# Altium PCB PCB1.PcbDoc
Units mil, origin at the board's own origin, x right, y up, seen from the top; angles counter-clockwise.
Board outline 3083 x 1476 mil, 2 copper layers (Top Layer, Bottom Layer); 15 components, 13 nets, 62 pads, 8 vias.
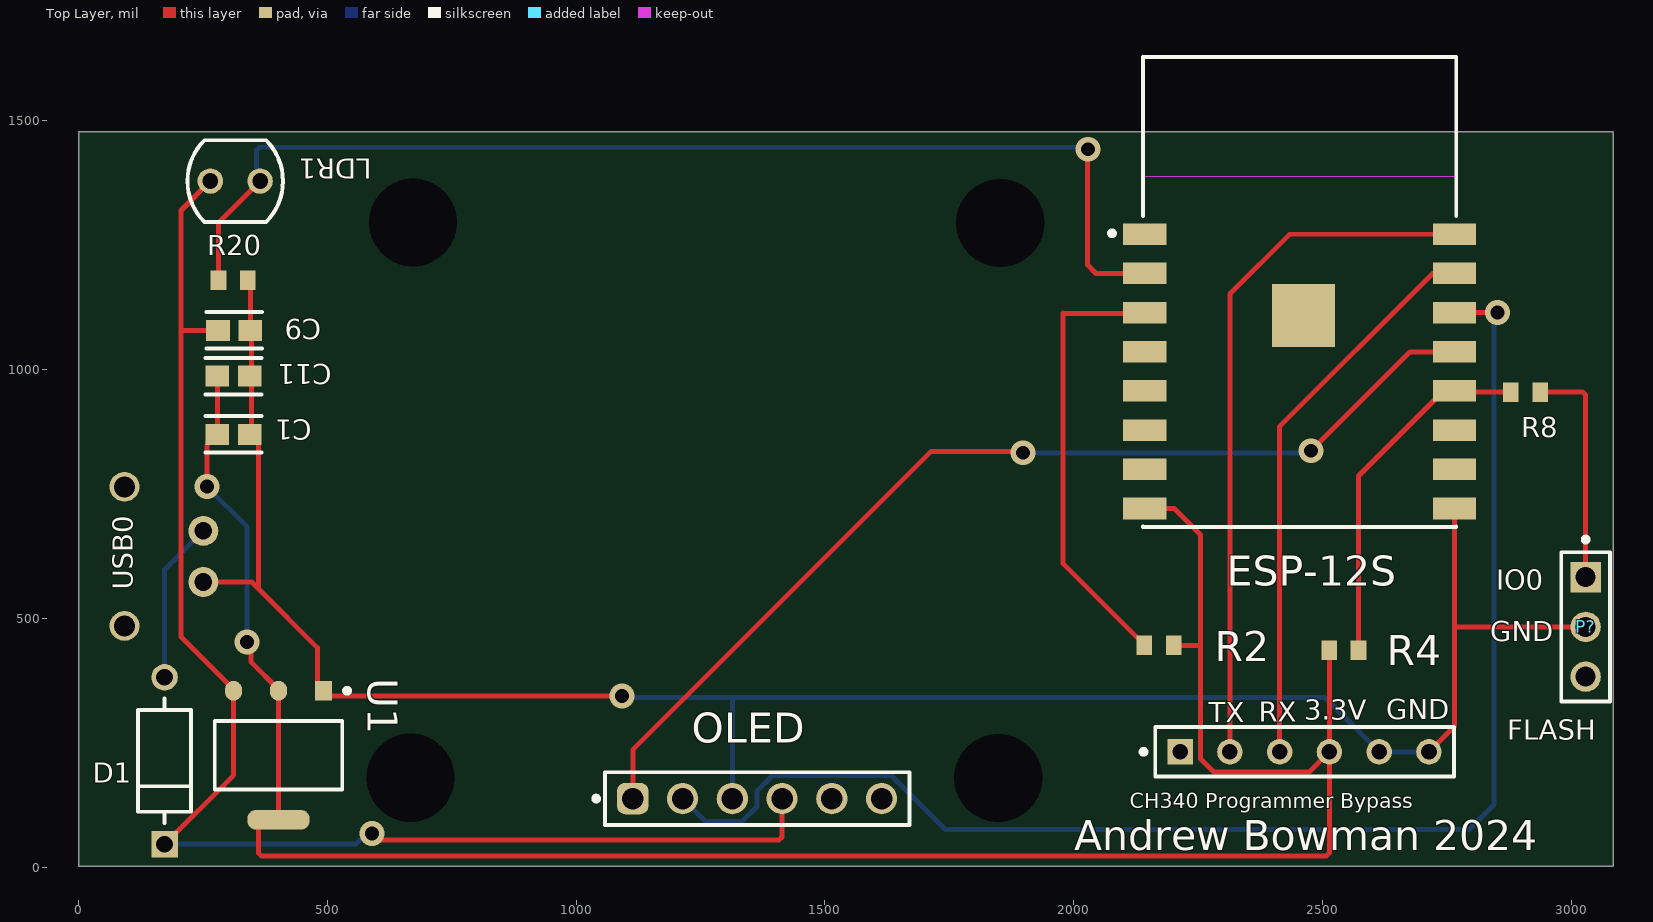
[diagram p0: Top Layer view]
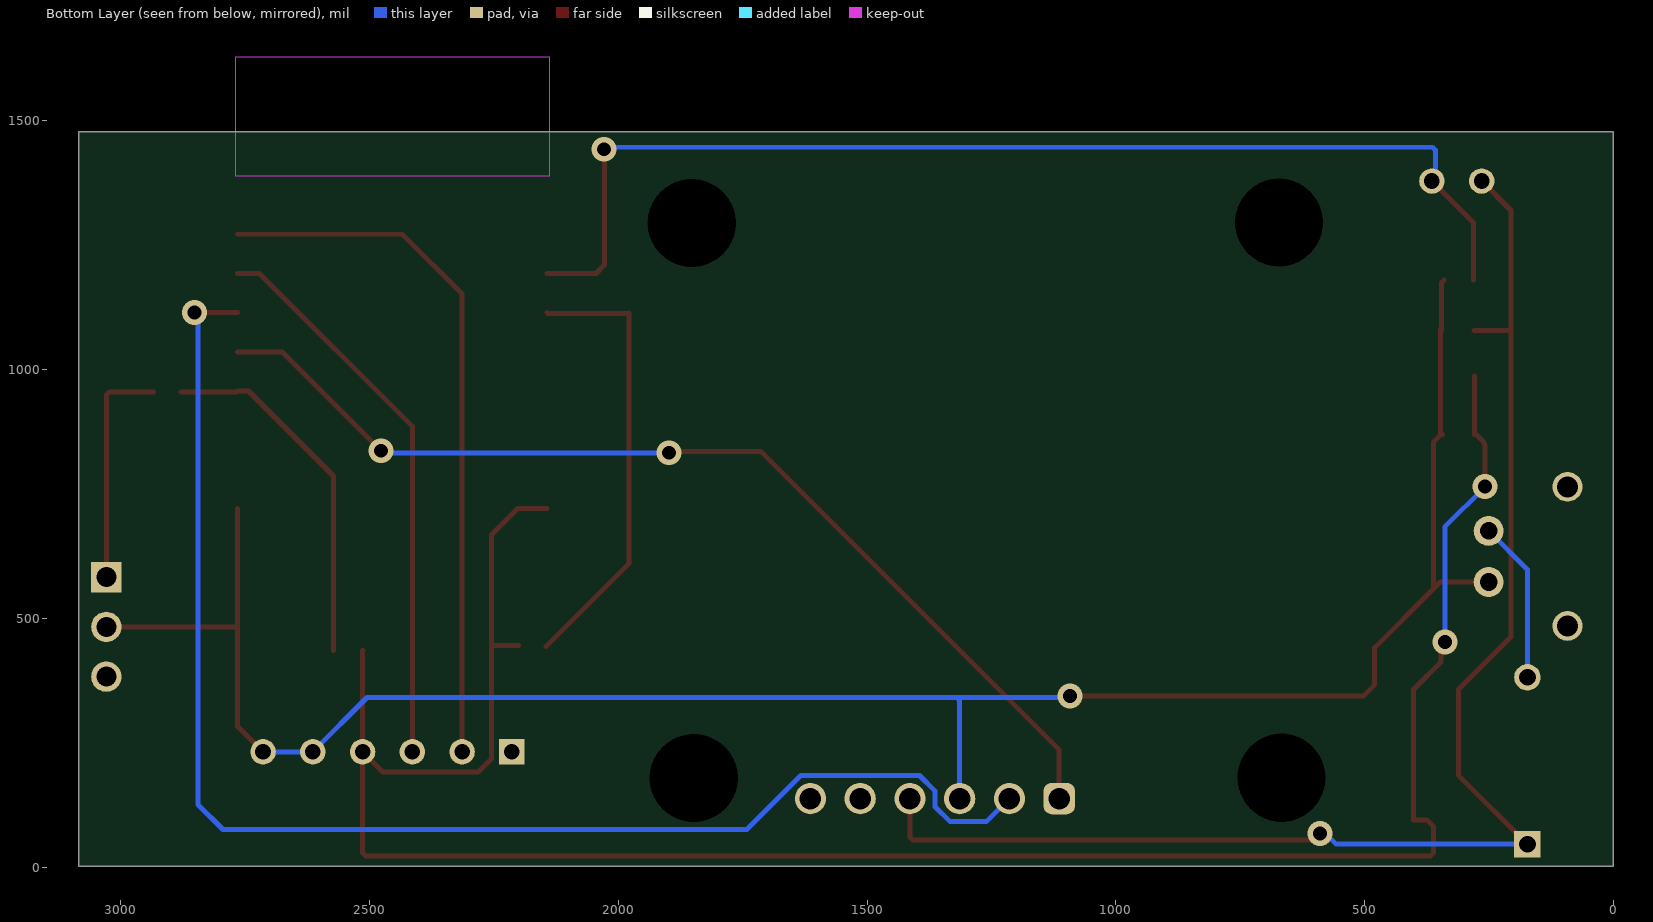
[diagram p1: Bottom Layer view, seen from below]
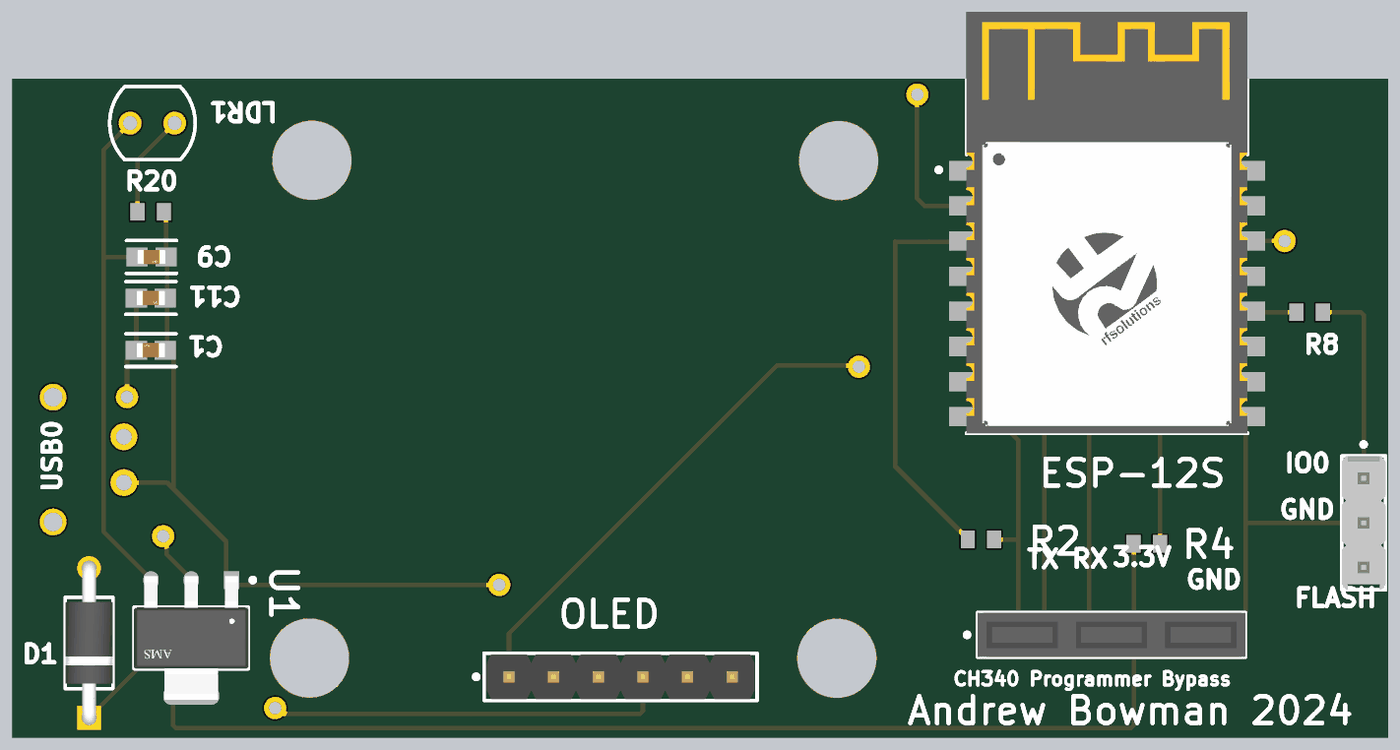
[diagram p2: 3D render of the assembled board from above, using the file's embedded part models]

## Layer stack, top to bottom
Top Solder: solder mask 0.4, Solder Resist, Dk 3.5
Top Layer: signal copper 1.4
Dielectric 1: dielectric 12.6, FR-4, Dk 4.8
Bottom Layer: signal copper 1.4
Bottom Solder: solder mask 0.4, Solder Resist, Dk 3.5

## Board outline
1,2 3084,2 3084,1478 1,1478

## Design rules (kind name [scope] priority, off if disabled: settings)
Clearance Clearance_1 [OnMid vs OnMid] p1: gap=10 ignorepadtopadclearanceinfootprint=FALSE except(20: Arc-Arc Arc-Track Arc-Text Track-Track Track-Text Text-Text) sourcerule=38 cellrowname=All cellrowtype=0 cellcolname=All cellcoltype=0 innerlayers=TRUE
Clearance Clearance_2 [(ExistsOnLayer('Top Layer') Or ExistsOnLayer('Bottom Layer')) vs (ExistsOnLayer('Top Layer') Or ExistsOnLayer('Bottom Layer'))] p2: gap=10 ignorepadtopadclearanceinfootprint=FALSE except(20: Arc-Arc Arc-Track Arc-Text Track-Track Track-Text Text-Text) sourcerule=38 cellrowname=All cellrowtype=0 cellcolname=All cellcoltype=0 outerlayers=TRUE
Clearance [All] p3: gap=10 ignorepadtopadclearanceinfootprint=FALSE ismatrix=TRUE
PolygonConnect [All] p1: connectstyle=Relief reliefconductorwidth=10 reliefentries=4 polygonreliefangle="90 Angle" airgapwidth=10
RoutingVias [All] p1: holewidth=28 width=50 viastyle="Through Hole" minholewidth=28 minwidth=50 maxholewidth=28 maxwidth=50
SolderMaskExpansion [All] p1: expansion=4 istentingtop=FALSE
SupplyNets "Schematic Supply Nets" [InNet('GND')] p1: voltage=0.000
Width MaxMinWidth_1 [All] p1: maxlimit=20 minlimit=10 preferedwidth=10 minimp=50.000000 maximp=50.000000 favimp=50.000000
Width [All] p2: maxlimit=10 minlimit=10 preferedwidth=10
30 further rules are at their usual default settings.

## Components (designator, comment, footprint, x,y, rotation, side; value= is the part's Value field where it differs from the comment)
C1 "06035C102KAT2A" FP-0603-L_1_6_0_15-W_0_81-IPC_A 311.51,870 r180 top
C9 "06035C102KAT2A" FP-0603-L_1_6_0_15-W_0_81-IPC_A 313,1079 r0 top
C11 "06035C102KAT2A" FP-0603-L_1_6_0_15-W_0_81-IPC_A 311.49,987 r0 top
"CH340 Programmer Bypass" "90147-1106" FP-90147-1106-MFG 2464,232 r0 top
D1 "1N4007" FP-1N4007E-E3-54-MFG 173,214 r90 top
ESP-12S "ESP-12S" FP-ESP-12S-MFG 2454,1156 r0 top
LDR1 "VT90N1" EXCE-VT90N1 315,1379 r180 top
OLED "61300611121" 61300611121 1364,138 r0 top
P? "22-28-4033" MOLX-22-28-4033_V 3029,483 r270 top
R2 "RC0603JR-070RL" RESC1608X55X25ML10T15 2171.47,446 r0 top
R4 "RC0603JR-070RL" RESC1608X55X25ML10T15 2543,436 r0 top
R8 "RC0603JR-070RL" RESC1608X55X25ML10T15 2908,955 r180 top
R20 "RC0603JR-070RL" RESC1608X55X25ML10T15 311,1180 r0 top
U1 "AMS1117-3.3" FP-AMS1117-IPC_C 402,225 r270 top
USB0 "Micro USB Power" "New footprint 1" 176,666 r270 top

## Footprints (in the part's own frame and the unit in brackets; to place one, negate y for a bottom-side part, rotate by r counter-clockwise, add the part's x,y. Pads: shape width x height; smd on the part's side, far side on the other; paste and mask are expansions set on the pad)
61300611121 [mm] "Pin Header, pitch 2.54 mm, THT, Vertical, single row, 6p"
  rrect50% 1.6x1.6 hole 1.1: 1(-6.35,0)
  round 1.6 hole 1.1: 2(-3.81,0) 3(-1.27,0) 4(1.27,0) 5(3.81,0) 6(6.35,0)
  silkscreen extent -8.34,-1.34 7.77,1.34, body extent -7.62,-1.27 7.62,1.27, height 8.57
EXCE-VT90N1 [mm] "THD, 2-Leads, Body Width 4.17mm (Max), Height 2.29mm"
  round 1.3 hole 0.8: 1(-1.27,0) 2(1.27,0)
  silkscreen extent -2.44,-2.08 2.44,2.08, body extent -2.44,-2.09 2.44,2.09, height 2.29
FP-1N4007E-E3-54-MFG [mm]
  rect 1.35x1.35 hole 0.85 paste-2539.97 mask+0: 1(-4.26,0)
  round 1.35 hole 0.85 paste-2539.97 mask+0: 2(4.26,0)
  silkscreen extent -3.19,-1.35 3.19,1.35, body extent -5.03,-1.45 5.03,1.45, height 0.25
FP-0603-L_1_6_0_15-W_0_81-IPC_A [mil]
  rect 47.5x42.06 smd paste+0 mask+0: 1(-32.51,0) 2(32.51,0)
  silkscreen extent -56,-37 56,37, body extent -76,-41 76,41, height 10
FP-90147-1106-MFG [mm]
  rect 1.3x1.3 hole 0.8 paste-2539.97 mask+0: 1(-6.35,0)
  round 1.3 hole 0.8 paste-2539.97 mask+0: 2(-3.81,0) 3(-1.27,0) 4(1.27,0) 5(3.81,0) 6(6.35,0)
  silkscreen extent -8.34,-1.27 7.62,1.27, body extent -7.72,-1.37 7.72,1.37, height 0.25
FP-AMS1117-IPC_C [mm]
  rect 1.004x0.872 smd paste+0 mask+0: 1(-3.295,2.29)
  rrect100% 1.004x0.872 smd paste+0 mask+0: 2(-3.295,0) 3(-3.295,-2.29)
  rrect87% 1.004x3.182 smd paste+0 mask+0: 4(3.295,0)
  silkscreen extent -3.42,-3.25 1.75,3.63, body extent -3.9,-3.35 3.9,3.35, height 0.25
FP-ESP-12S-MFG [mm]
  rect 2.2x1.1 smd paste+0 mask+0: 1(-7.9,2.95) 2(-7.9,0.95) 3(-7.9,-1.05) 4(-7.9,-3.05) 5(-7.9,-5.05) 6(-7.9,-7.05) 7(-7.9,-9.05) 8(-7.9,-11.05) 9(7.9,-11.05) 10(7.9,-9.05) 11(7.9,-7.05) 12(7.9,-5.05) 13(7.9,-3.05) 14(7.9,-1.05) 15(7.9,0.95) 16(7.9,2.95)
  rect 3.2x3.2 smd paste+0 mask+0: 17(0.2,-1.2)
  Keep-Out Layer region: -8,5.9 8,5.9 8,12 -8,12
  Keep-Out Layer region: -8,5.9 8,5.9 8,12 -8,12
  silkscreen extent -9.7,-12 8,12, body extent -8,-12 8,12, height 3
MOLX-22-28-4033_V [mm] "THD, 3-Leads, Body 7.62x2.49mm, Pitch 2.54mm"
  rect 1.55x1.55 hole 1.02: 1(-2.54,0)
  round 1.55 hole 1.02: 2(0,0) 3(2.54,0)
  silkscreen extent -4.58,-1.25 3.81,1.25, body extent -3.81,-1.24 3.81,1.24, height 8.38
"New footprint 1" [mil]
  round 60 hole 42: 6(-98.58,-83.58) 6(180.94,-83.58)
  round 60 hole 35.43: GND(92.76,75) VCC(-10,75)
RESC1608X55X25ML10T15 [mm] "Chip Resistor, 2-Leads, Body 1.60x0.80mm, IPC Low Density"
  rect 0.8x1 smd: 1(-0.75,0) 2(0.75,0)
  body extent -0.85,-0.45 0.85,0.45, height 0.55

## Part data
C1: library part CMP-2006-04378-2, "General Purpose Ceramic Capacitor, 0603, 1nF, 10%, X7R, 15%, 50V", Capacitance=100uF, Case Code (Imperial)=0603, Case Code (Metric)=1608, Dielectric=X7R, Dielectric Material=Ceramic, Max Operating Temperature=125°C, Min Operating Temperature=-55°C, Package Quantity=4000, Tolerance=10%, Voltage=50V, Case/Package=0603, Construction=Flat, Contact Plating=Tin, Depth=0.81mm, Height=0.9mm, Lead Free="Lead Free", Length=1.6mm, Mount="Surface Mount", Number of Pins=2, Packaging="Tape and Reel", Radiation Hardening=No, REACH SVHC="No SVHC", RoHS Compliant=Yes, Series=-, Termination=SMD/SMT, Thickness=0.035inch, Voltage Rating=50V, Voltage Rating (DC)=50V, Weight=7.1E-05oz, Width=0.032inch
C9: library part CMP-2006-04378-2, "General Purpose Ceramic Capacitor, 0603, 1nF, 10%, X7R, 15%, 50V", Capacitance=1uF, Case Code (Imperial)=0603, Case Code (Metric)=1608, Dielectric=X7R, Dielectric Material=Ceramic, Max Operating Temperature=125°C, Min Operating Temperature=-55°C, Package Quantity=4000, Tolerance=10%, Voltage=50V, Case/Package=0603, Construction=Flat, Contact Plating=Tin, Depth=0.81mm, Height=0.9mm, Lead Free="Lead Free", Length=1.6mm, Mount="Surface Mount", Number of Pins=2, Packaging="Tape and Reel", Radiation Hardening=No, REACH SVHC="No SVHC", RoHS Compliant=Yes, Series=-, Termination=SMD/SMT, Thickness=0.035inch, Voltage Rating=50V, Voltage Rating (DC)=50V, Weight=7.1E-05oz, Width=0.032inch
C11: library part CMP-2006-04378-2, "General Purpose Ceramic Capacitor, 0603, 1nF, 10%, X7R, 15%, 50V", Capacitance=10uF, Case Code (Imperial)=0603, Case Code (Metric)=1608, Dielectric=X7R, Dielectric Material=Ceramic, Max Operating Temperature=125°C, Min Operating Temperature=-55°C, Package Quantity=4000, Tolerance=10%, Voltage=50V, Case/Package=0603, Construction=Flat, Contact Plating=Tin, Depth=0.81mm, Height=0.9mm, Lead Free="Lead Free", Length=1.6mm, Mount="Surface Mount", Number of Pins=2, Packaging="Tape and Reel", Radiation Hardening=No, REACH SVHC="No SVHC", RoHS Compliant=Yes, Series=-, Termination=SMD/SMT, Thickness=0.035inch, Voltage Rating=50V, Voltage Rating (DC)=50V, Weight=7.1E-05oz, Width=0.032inch
"CH340 Programmer Bypass": library part CMP-00257-00773391-1, "90147-1106 C-Grid PC Board Connector, Single Row, Vertical, 6 Circuits, Tin (Sn) Plating", Current Rating=3A, Flammability Rating="UL94 V-0", Manufacturer Lifecycle Status=ACTIVE, Max Operating Temperature=125°C, Min Operating Temperature=-55°C, Voltage Rating=350V, Contact Gender=Female, Contact Material=Bronze, Contact Plating=Tin, Country of Origin=SG, Gender=Receptacle, Glow Wire Compliant=Non-compliant, Housing Material=Polyester, Lifecycle Status=Production, Material=Bronze, Mount="Through Hole", NexarPartId=773391, Number of Circuits=6, Number of Contacts=6, Number of Positions=6, Number of Rows=1, Orientation=Vertical, Pitch=2.54mm, Plating=Tin, Radiation Hardening=No, RoHS=Compliant, Termination="Through Hole"
D1: library part CMP-02540-000087-1, "DIODE GEN PURP 1KV 1A DO204AL", Average Rectified Current=1A, Case/Package=DO-41, Forward Voltage=1.1V, Max Operating Temperature=150°C, Max Repetitive Reverse Voltage (Vrrm)=1kV, Max Reverse Current=5uA, Max Surge Current=45A, Min Operating Temperature=-50°C, Package Quantity=5500, Contact Plating=Tin, Element Configuration=Single, Max Reverse Voltage (DC)=1kV, Mount="Through Hole", Number of Pins=2, Packaging="Tape and Reel", Peak Non-Repetitive Surge Current=45A, Radiation Hardening=No, Reverse Voltage=1kV, RoHS Compliant=Yes, Series=-
ESP-12S: library part CMP-204316-000002-1, "RX TXRX MOD WIFI PCB TRACE SMD", Frequency=2.484GHz, Data Rate=54Mbps, Interface=I2C, Sensitivity=-90dBm, Series=-
LDR1: library part CMP-2000-07406-1, "Photoconductive Resistor, 200 kOhm, 100 V, 80 mW, -40 to 75 degC, 2-Pin THD, RoHS", Dark Resistance=200kohm, Manufacturer="Excelitas Technology", Operating Temperature Max=75°C, Operating Temperature Min=-40°C, Package Description="2-Pin Through Hole Device, Body Width 4.17 mm (Max), Height 2.29 mm", Power Rating=80mW, Resistance @ Lux=12kohm, Resistor Case Style=-, Voltage Rating=100V, Datasheet URL=http://datasheet.octopart.com/VT90N1-Excelitas-datasheet-10388451.pdf, Datasheet Version=09/2006, Manufacturer URL=http://www.excelitas.com/Pages/Index.aspx, Mounting Technology=ThroughHole, Package Reference=VT90N1, Packaging=Each, Product Range=-, SVHC=Cadmiumchloride(15-Jun-2015)
OLED: library part CMP-1502-01070-3, Color=Black, Contact Resistance=20mΩ, Current Rating=3A, Max Operating Temperature=105°C, Min Operating Temperature=-40°C, Operating Supply Voltage=250V, Connector Type="Male Pin", Contact Gender=Male, Contact Material=Copper, Contact Mating Length=5.9944mm, Contact Plating=Gold, Gender=Male, Height=8.89mm, Housing Material=PBT, Lead Free="Lead Free", Lead Pitch=2.54mm, Mount="Through Hole", NexarPartId=20084590, Number of Contacts=4, Number of Pins=4, Number of Positions=4, Number of Rows=1, Orientation=Vertical, Packaging=Bulk, Pitch=2.54mm, REACH SVHC=Unknown, RoHS=Compliant, Termination="Through Hole", Voltage Rating=250V
P?: library part CMP-1676-00001-5, "Male Header, Pitch 2.54 mm, 1 x 3 Position, Height 8.38 mm, Tail Length 3.18 mm, RoHS, Bulk", Colour=Black, Current Rating="4 A", Manufacturer=Molex, Max Operating Temperature="75 degC", Min Operating Temperature="0 degC", Package Quantity=1, Voltage Rating="250 V", ComponentLink1Description="Manufacturer URL", ComponentLink1URL=http://www.molex.com/, ComponentLink2Description=Datasheet, ComponentLink2URL=http://www.molex.com/pdm_docs/sd/022284033_sd.pdf, Contact Finish=Gold, Contact Material=Brass, Contact Plating=Gold, DatasheetVersion="Rev. G, 01/2012", Height="8.38 mm", Lead Pitch="0.1 inch", Length="7.62 mm", Mount="Through Hole", Mounting Technology="Through Hole", PackageDescription="Male Header, Pitch 2.54 mm, 1 x 3 Position, Height 8.38 mm, Tail Length 3.18 mm", PackageReference=22-28-4033, Packaging=Bulk, Pins=3, REACH SVHC=Unknown, RoHSCompliant=true, Rows=1
R2 R4: library part CMP-2100-03667-1, "Chip Resistor, 0 Ohm, +/- 5%, 0.1 W, -55 to 155 degC, 0603 (1608 Metric), RoHS, Tape and Reel", Case Code (Imperial)=0603, Case Code (Metric)=1608, Manufacturer=Yageo, Max Operating Temperature=155degC, Min Operating Temperature=-55degC, Package Description="2-Pin Surface Mount Device, Body 1.6 x 0.8 mm", Package Quantity=5000, Power Rating=100mW, Resistance=12kOhm, Temperature Coefficient=200ppm/degreesC, Tolerance=5%, Voltage Rating=50V, Case/Package=0603, Composition=ThickFilm, Contact Plating=Tin, Datasheet URL=http://www.yageo.com/NewPortal/yageodocoutput?fileName=/pdf/R-Chip/PYu-RC_Group_51_RoHS_L_5.pdf, Datasheet Version="Rev. 5, 10/2016", Depth=0.8mm, Height=0.45mm, Lead Free=LeadFree, Length=1.6mm, Manufacturer URL=http://www.yageo.com/, Military Standard=Not, Number of Pins=2, Package Reference=0603, Packaging=TapeandReel, Radiation Hardening=No, REACH SVHC=NoSVHC, RoHSCompliant=true, Termination=SMD/SMT, Voltage Rating (DC)=50V, Width=0.8mm
R8: library part CMP-2100-03667-1, "Chip Resistor, 0 Ohm, +/- 5%, 0.1 W, -55 to 155 degC, 0603 (1608 Metric), RoHS, Tape and Reel", Case Code (Imperial)=0603, Case Code (Metric)=1608, Manufacturer=Yageo, Max Operating Temperature=155degC, Min Operating Temperature=-55degC, Package Description="2-Pin Surface Mount Device, Body 1.6 x 0.8 mm", Package Quantity=5000, Power Rating=100mW, Resistance=470Ohm, Temperature Coefficient=200ppm/degreesC, Tolerance=5%, Voltage Rating=50V, Case/Package=0603, Composition=ThickFilm, Contact Plating=Tin, Datasheet URL=http://www.yageo.com/NewPortal/yageodocoutput?fileName=/pdf/R-Chip/PYu-RC_Group_51_RoHS_L_5.pdf, Datasheet Version="Rev. 5, 10/2016", Depth=0.8mm, Height=0.45mm, Lead Free=LeadFree, Length=1.6mm, Manufacturer URL=http://www.yageo.com/, Military Standard=Not, Number of Pins=2, Package Reference=0603, Packaging=TapeandReel, Radiation Hardening=No, REACH SVHC=NoSVHC, RoHSCompliant=true, Termination=SMD/SMT, Voltage Rating (DC)=50V, Width=0.8mm
R20: library part CMP-2100-03667-1, "Chip Resistor, 0 Ohm, +/- 5%, 0.1 W, -55 to 155 degC, 0603 (1608 Metric), RoHS, Tape and Reel", Case Code (Imperial)=0603, Case Code (Metric)=1608, Manufacturer=Yageo, Max Operating Temperature=155degC, Min Operating Temperature=-55degC, Package Description="2-Pin Surface Mount Device, Body 1.6 x 0.8 mm", Package Quantity=5000, Power Rating=100mW, Resistance=150kOhm, Temperature Coefficient=200ppm/degreesC, Tolerance=5%, Voltage Rating=50V, Case/Package=0603, Composition=ThickFilm, Contact Plating=Tin, Datasheet URL=http://www.yageo.com/NewPortal/yageodocoutput?fileName=/pdf/R-Chip/PYu-RC_Group_51_RoHS_L_5.pdf, Datasheet Version="Rev. 5, 10/2016", Depth=0.8mm, Height=0.45mm, Lead Free=LeadFree, Length=1.6mm, Manufacturer URL=http://www.yageo.com/, Military Standard=Not, Number of Pins=2, Package Reference=0603, Packaging=TapeandReel, Radiation Hardening=No, REACH SVHC=NoSVHC, RoHSCompliant=true, Termination=SMD/SMT, Voltage Rating (DC)=50V, Width=0.8mm
U1: library part CMP-209535-000001-1, "LDO Voltage Regulators 1A, 3.3V", Dropout Voltage=1.1V, Manufacturer="Advanced Monolithic Systems", Max Junction Temp=+125°C, Max Power Dissipation=1.2W, Max Supply Voltage=15V, Nominal Supply Current=5mA, Output Current=1A, Output Voltage=3.3V, Package=AMS1117, Temperature="-40°C to +125°C", Temperature Range Low=-40°C, Automotive=No, Category=IC, ComponentLink2Description=Datasheet, ComponentLink2URL=http://www.advanced-monolithic.com/pdf/ds1117.pdf, Device Class L1="Integrated Circuits (ICs)", Device Class L2="Power Management ICs", Device Class L3="Voltage Regulators - Linear", Height=1.8mm, Ipc Land Pattern Name=SOT229P700X180-4, Lead Free=Yes, Manufacturer Part Number=AMS1117-3.3, Number of Outputs=1, Octopart=https://octopart.com/ams1117-3.3-advanced+monolithic+systems-25899300, Output Type=Fixed, RoHS=TRUE, Standoff Height=0.64mm, Temperature Range High=+125°C
USB0: library part CMP-00000-1, "AliExpress Power only", ComponentLink1URL=https://www.aliexpress.us/item/3256805200931778.html?spm=a2g0o.cart.0.0.5df638daVS0vN6&mp=1&_gl=1*q0htwa*_gcl_au*NjQxNDY5NDMxLjE3MzAwODc0Mjc.*_ga*MTMxMjAwMjU3NTAxNzE4Ny4xNzMwMDg3MzYyMDU5*_ga_VED1YSGNC7*MTczMjMzMzE4OC4yLjEuMTczMjMzNjUxOS41OS4wLjA.&gatewayAdapt=glo2usa#nav-specification, Connector Type="Micro USB"

## Free pads (board coordinates)
  round 60 hole 177.17: 9(667,180) 9(672.43,1295.57) 9(1848.57,179.43) 9(1852.57,1295)

## Via types
v1: diameter 50, hole 28, Top Layer to Bottom Layer, 8 vias

## Nets (pads, with @x,y where several pads share a name; then routed paths per layer and width w, separated by ;. In a path a pad name is that pad's centre, name@x,y a point inside that pad or via, vN(x,y) a via of type N, cw(c..) or ccw(c..) an arc to the next point about the centre after c; other vN are vias at no path point)
GND: "CH340 Programmer Bypass.5" "CH340 Programmer Bypass.6" C1.1 C9.2 C11.2 ESP-12S.9 OLED.3 P?.2 R20.2 U1.1 USB0.GND | length 4258.3
  Top Layer w10: USB0.GND 348.09,573.24 362,559.33 ; R20.2 345.51,1175.01 C9.2 ; C1.1 345.97,870 362,853.97 362,559.33 ; C1.1@348.09,870 C9.2@348.09,1081.44 ; v1(1092,344) 502.88,344 U1.1 480,366.88 480,441.33 362,559.33 ; 2714,232 2765.02,283.02 2765.02,483 2765.02,488.86 ESP-12S.9 ; 2768,483 P?.2
  Bottom Layer w10: v1(1092,344) 1095,341 1320,341 ; OLED.3 1314,335 1320,341 ; 2714,232 2614,232 2505,341 1320,341
NetC1_2: "CH340 Programmer Bypass.4" C1.2 C11.1 ESP-12S.8 R2.2 R4.1 U1.2 U1.4 | length 4551.4
  Top Layer w10: v1(258,765) 258,849.06 260.25,851.31 260.25,853.97 276.31,870.03 C1.2 C11.1 ; v1(339,453) 346.33,445.67 346.33,413 402,357.33 U1.2 U1.4 375.4,95.28 361.56,81.44 361.56,28.86 367.42,23 2508.14,23 2514,28.86 2514,232 ; ESP-12S.8 2202,720.96 2255,667.96 2255,442.98 ; R2.2 2251.98,446 2255,442.98 ; R4.1 2514,435.47 2514,232 ; 2255,442.98 2255,218 2282,191 2473,191 2514,232
  Bottom Layer w10: v1(258,765) 339,684 v1(339,453)
NetC9_1: C9.1 D1.1 LDR1.2 OLED.4 U1.3 | length 2863.2
  Top Layer w10: D1.1 311.84,185.13 U1.3 311.84,357.33 206,463.17 206,1080.5 ; LDR1.2 206,1320 206,1080.5 ; C9.1 207.5,1079 206,1080.5 ; v1@590,55 1408.14,55 1414,60.86 OLED.4
  Bottom Layer w10: D1.1 557.46,46.28 579.18,68 v1(590,68)
"NetCH340 Programmer Bypass_2": "CH340 Programmer Bypass.2" ESP-12S.16 | length 1420.9
  Top Layer w10: 2314,232 2314,1152.14 2434,1272.14 ESP-12S.16
"NetCH340 Programmer Bypass_3": "CH340 Programmer Bypass.3" ESP-12S.15 | length 1132.4
  Top Layer w10: 2414,232 2414,886 2721.4,1193.4 ESP-12S.15
NetD1_2: D1.2 USB0.VCC | length 326.6
  Bottom Layer w10: D1.2 173,598 USB0.VCC
NetESP-12S_1: ESP-12S.1
NetESP-12S_2: ESP-12S.2 LDR1.1 R20.1 | length 2329.1
  Top Layer w10: R20.1 281.47,1295.47 LDR1.1 ; v1(2029,1443) 2027.68,1441.68 2027.68,1210.58 2044.86,1193.4 ESP-12S.2
  Bottom Layer w10: LDR1.1 358,1386 358,1441.14 363.86,1447 2025,1447 v1(2029,1443)
NetESP-12S_3: ESP-12S.3 R2.1 | length 901.4
  Top Layer w10: 1978.94,1114 1978.94,610.06 R2.1@2145,444 ; 1981,1113 2141.31,1113 ESP-12S.3
NetESP-12S_12: ESP-12S.12 R4.2 R8.2 | length 727.9
  Top Layer w10: R4.2 2572.53,786.34 2743.37,957.18 ESP-12S.12 2767.09,955.11 R8.2@2878.47,955.11
NetESP-12S_13: ESP-12S.13 OLED.1 | length 2082.8
  Top Layer w10: OLED.1 1114,236 1714,836 1895,836 v1(1898,833) ; v1(2477,837) 2675.92,1035.92 ESP-12S.13
  Bottom Layer w10: v1(1898,833) 2471,833 2475,837 v1(2477,837)
NetESP-12S_14: ESP-12S.14 OLED.2 | length 2851.4
  Top Layer w10: ESP-12S.14 v1(2852,1114.66)
  Bottom Layer w10: OLED.2 1260.5,91.5 1333.26,91.5 1364,122.24 1364,153.76 1394.74,184.5 1633.26,184.5 1741.91,75.84 2794.57,75.84 2845,126.27 2845,1107.66 v1(2852,1114.66)
NetP?_1: P?.1 R8.1 | length 463.2
  Top Layer w10: R8.1@2934.53,955.11 3023.14,955.11 3029,949.25 P?.1
pads on no net: "CH340 Programmer Bypass.1" ESP-12S.4 ESP-12S.5 ESP-12S.6 ESP-12S.7 ESP-12S.10 ESP-12S.11 ESP-12S.17 OLED.5 OLED.6 P?.3 USB0.6

## Silkscreen, mask and mechanical layers (free items; w line width, h text height)
Top Overlay:
  text "IO0" at 2849,558 h40
  text "GND" at 2837,454 h40
  text "GND" at 2628,297 h40
  text "3.3V" at 2463,296 h40
  text "RX" at 2372,292 h40
  text "TX" at 2272,291 h40
  text "FLASH" at 2871,256 h40
  text "Andrew Bowman 2024" at 2001,34 h60
Mechanical 1:
  the board outline again, w1